# Altium PCB main_v2.PcbDoc
Units mm, origin at the board's own origin, x right, y up, seen from the top; angles counter-clockwise.
Board outline 126.75 x 53.1 mm, 2 copper layers (Top Layer, Bottom Layer); 68 components, 27 nets, 172 pads, 2 vias.
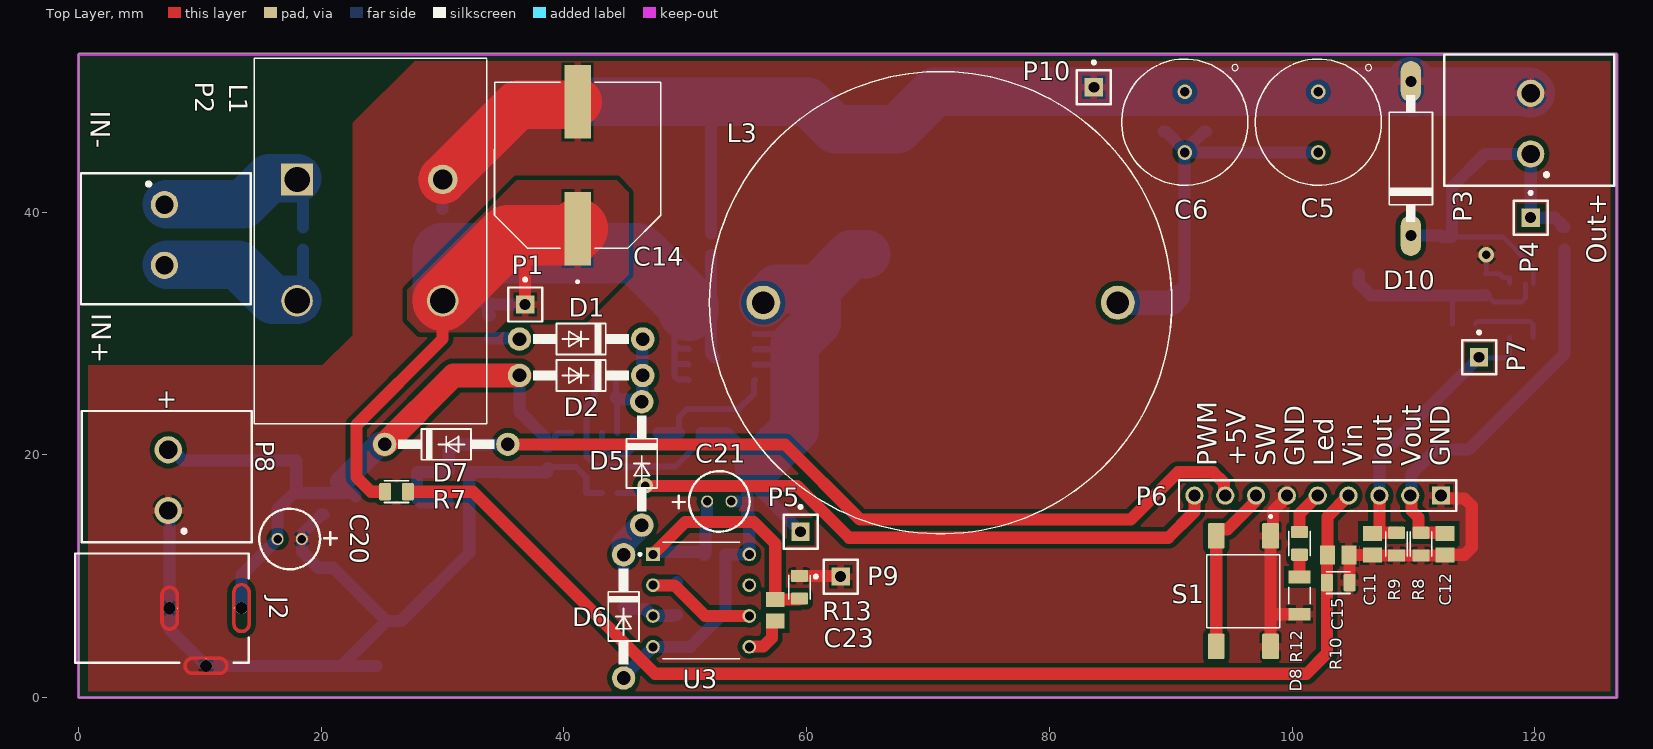
[diagram p0: Top Layer view]
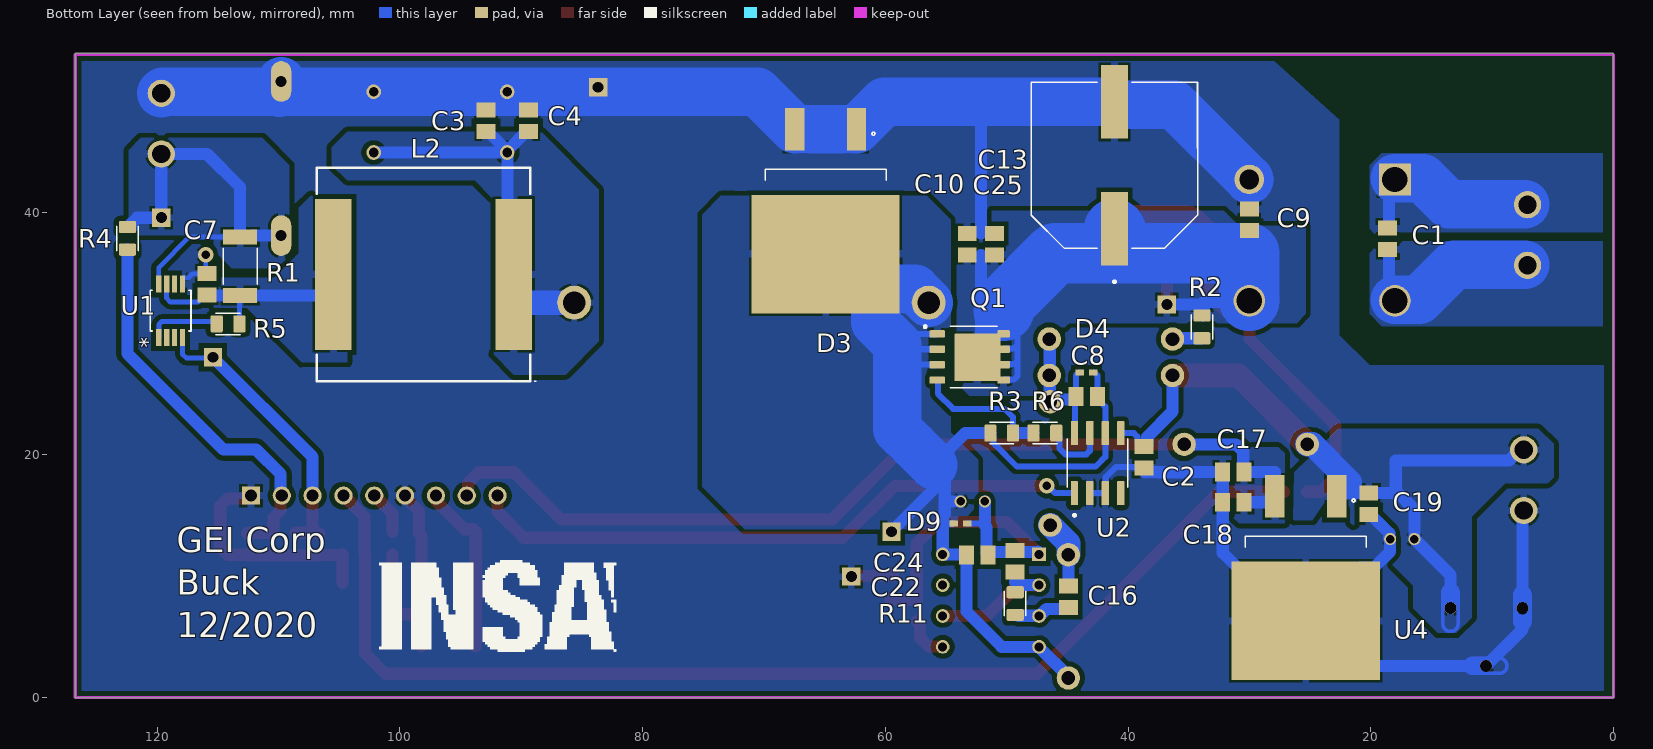
[diagram p1: Bottom Layer view, seen from below]
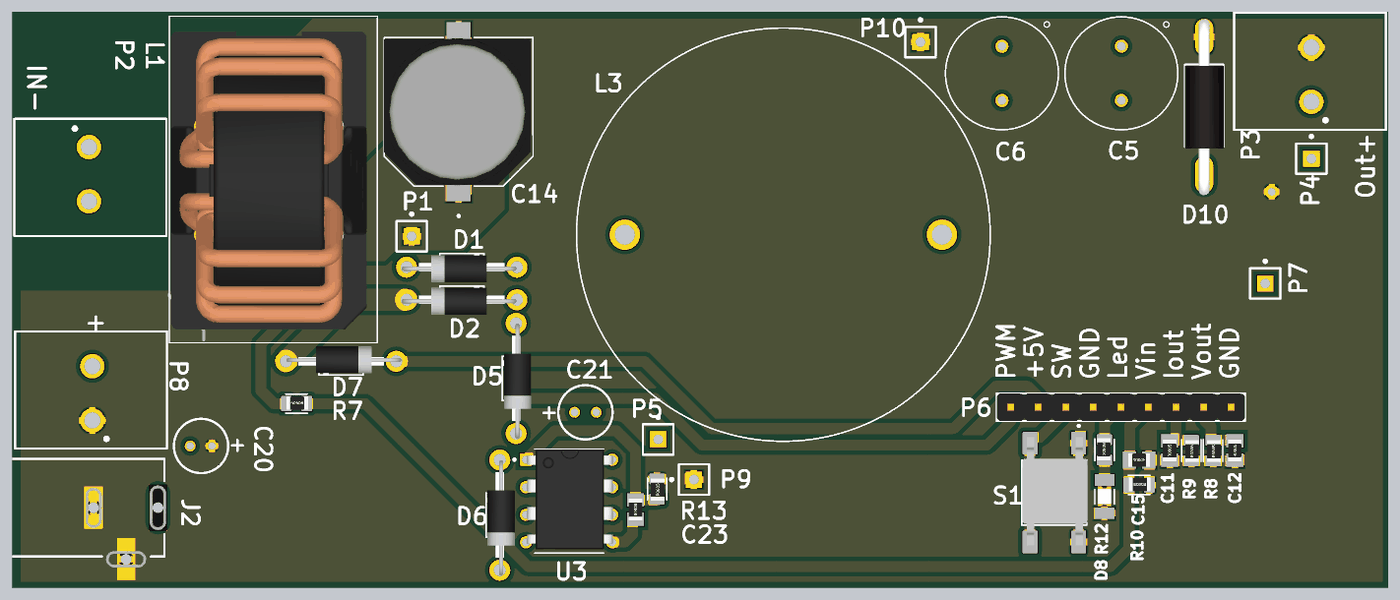
[diagram p2: 3D render of the assembled board from above, using the file's embedded part models]
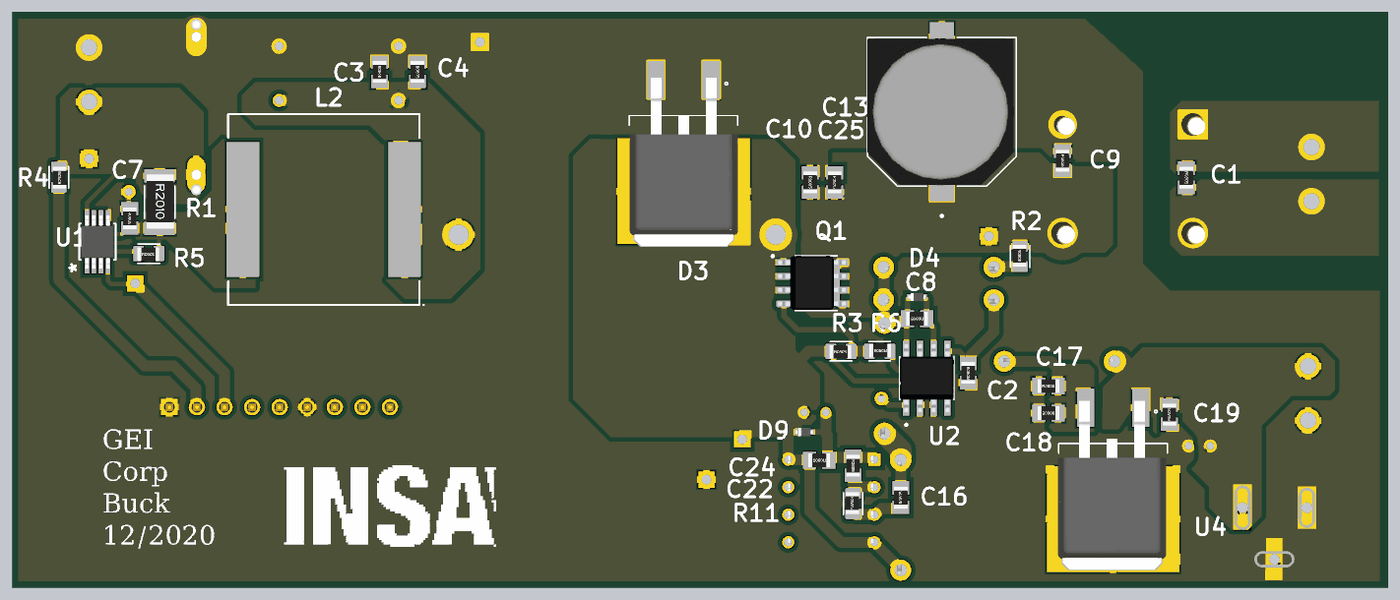
[diagram p3: 3D render of the assembled board from below, using the file's embedded part models]

## Layer stack, top to bottom
Top Solder: solder mask 0.0102, Solder Resist, Dk 3.5
Top Layer: signal copper 0.0356
Dielectric 1: dielectric 0.32, FR-4, Dk 4.8
Bottom Layer: signal copper 0.0356
Bottom Solder: solder mask 0.0102, Solder Resist, Dk 3.5

## Board outline
0,0 126.75,0 126.75,53.1 0,53.1

## Design rules (kind name [scope] priority, off if disabled: settings)
Clearance [All] p1: gap=0.4 ignorepadtopadclearanceinfootprint=FALSE except(0: Arc-Hole Track-Hole SMDPad-Hole THPad-Hole Via-Hole Fill-Hole Poly-Hole Region-Hole Text-Hole; 0.2: Arc-Arc Arc-Track Arc-SMDPad Arc-THPad Arc-Via Track-Track Track-SMDPad Track-THPad Track-Via SMDPad-SMDPad SMDPad-THPad SMDPad-Via THPad-THPad THPad-Via)
PolygonConnect [All] p1: connectstyle=Relief reliefconductorwidth=0.6 reliefentries=4 polygonreliefangle="90 Angle" airgapwidth=0.2
RoutingVias [All] p1: holewidth=0.711 width=1.27 viastyle="Through Hole" minholewidth=0.711 minwidth=1.27 maxholewidth=0.711 maxwidth=1.27
SolderMaskExpansion [All] p1: expansion=0.102 istentingtop=FALSE
Width [All] p1: maxlimit=10 minlimit=0.254 preferedwidth=1 minimp=50.000000 maximp=50.000000 favimp=50.000000
30 further rules are at their usual default settings.

## Components (designator, comment, footprint, x,y, rotation, side; value= is the part's Value field where it differs from the comment)
C1 "Cap" C0805 18.6,37.8 r270 bottom value=100n
C2 "Cap" C0805 38.7,19.8 r90 bottom value=100n
C3 "Cap" C0805 92.912,47.551 r270 bottom value=100n
C4 "Cap" C0805 89.412,47.551 r270 bottom value=100n
C5 "2 x UDB1H4RMPM1TD" C1-C2 102.162,47.551 r270 top value=4.7u
C6 "2 x UDB1H4RMPM1TD" C1-C2 91.162,47.551 r270 top value=4.7u
C7 "Cap" C0805 115.912,34.051 r270 bottom value=100n
C8 "Cap" C0805 43.412,24.801 r0 bottom value=330n
C9 "Cap" C0805 30,39.373 r270 bottom value=100n
C10 "Cap" C0805 53.25,37.373 r270 bottom value=100n
C11 "Cap" C0805 106.612,12.651 r90 top value=2n7
C12 "Cap" C0805 112.612,12.651 r90 top value=2n7
C13 "EEVFK1K101Q" C_Pol_EEV-FK1K101Q 41.25,43.873 r90 bottom value=100u
C14 "EEVFK1K101Q" C_Pol_EEV-FK1K101Q 41,43.873 r90 top value=100u
C15 "Cap" C0805 103.8,11.773 r180 top value=2n7
C16 "22n" C0805 44.912,8.316 r90 bottom
C17 "Cap" C0805 31.312,18.601 r180 bottom value=100n
C18 "1u" C0805 31.312,16.101 r0 bottom
C19 "Cap" C0805 20.162,15.966 r90 bottom value=100n
C20 "Cap Pol2" C_10u 16.4,13.073 r0 top value=10u
C21 "Cap Pol2" C_10u 53.8,16.173 r180 top value=10u
C22 "Cap" C0805 49.299,11.253 r270 bottom value=1n
C23 "Cap" C0805 57.412,7.201 r270 top value=100n
C24 "Cap" C0805 52.414,11.753 r0 bottom value=100n
C25 "Cap" C0805 51,37.373 r270 bottom value=100n
D1 "Diode 1N4004" diode_1N4004 41.412,29.551 r180 top
D2 "Diode 1N4004" diode_1N4004 41.412,26.551 r180 top
D3 "STPS30L60C" Diode_Scho 64.912,37.459 r270 bottom
D4 "BZX584C15G3-08" SOT-523 43.412,26.801 r180 bottom
D5 "Diode_1N4148" diode_1N4004 46.412,19.301 r270 top
D6 "Diode_1N4148" diode_1N4004 44.912,6.701 r270 top
D7 "Diode 1N4004" diode_1N4004 30.3,20.873 r0 top
D8 "KPTL-3216SURCK-01" LED 100.612,8.401 r270 top
D9 "BZX584C15G3-08" SOT-523 53.799,14.353 r180 bottom
D10 "Diode-DO15" DO15 109.912,44.301 r90 top
J2 "Prise d'alimentation4840.2201" "Prise d'alimentation4840.2201" 11.25,14.973 r270 top
L1 "EMI_Choke" EMI_Choke 24,37.7 r0 top
L2 "SRP1770TA-220M" SRP1770TA-220M 98.05,34.75 r0 bottom value=22uH
L3 "1140-121K-RC" L_120 71.412,32.551 r0 top value=120uH
P1 "Plug" PIN1 36.8,32.4 r0 top
P2 "Block_2Position" Block_2Position 7.2,38 r270 top
P3 "Block_2Position" Block_2Position 119.535,47.428 r90 top
P4 "Plug" PIN1 119.662,39.551 r0 top
P5 "Plug" PIN1 59.5,13.673 r0 top
P6 "Header 9" HDR1X9 112.272,16.651 r180 top
P7 "Plug" PIN1 115.412,28.051 r0 top
P8 "Block_2Position" Block_2Position 7.262,18.051 r90 top
P9 "Plug" PIN1 62.8,9.973 r90 top
P10 "Plug" PIN1 83.662,50.301 r0 top
Q1 "SIR120DP-T1-RE3" MOFET_SIR120DP-T1-RE3 52.962,28.201 r180 bottom
R1 "WSL20106L000FEA18" R0.006 113.162,35.551 r270 bottom value=0.006
R2 "Res1" R0805 33.912,30.551 r270 bottom value=1k
R3 "Res1" R0805 50.412,21.801 r180 bottom value=100k
R4 "Res1" R0805 122.45,37.85 r90 bottom value=100k
R5 "Res1" R0805 114.162,30.801 r180 bottom value=100
R6 "Res1" R0805 46.847,21.801 r0 bottom value=10
R7 "Res1" R0805 26.2,16.973 r180 top value=100k
R8 "Res1" R0805 110.612,12.651 r90 top value=6k2
R9 "Res1" R0805 108.612,12.651 r90 top value=5k1
R10 "Res1" R0805 103.8,9.473 r180 top value=6k2
R11 "Res1" R0805 49.299,7.753 r270 bottom value=100k
R12 "Res1" R0805 100.612,12.716 r270 top value=1k
R13 "Res1" R0805 59.4,9.1 r90 top value=1k
S1 "4-1437565-1" Switch 96.112,8.901 r270 top
U1 "LTC6101AIMS8PBF" LTC6101AIMS8#PBF 119.162,31.801 r90 bottom
U2 "IR7184STRPBF" IR7184STRPBF 42.507,19.199 r90 bottom
U3 "LM555CN/NOPB" LM555CN/NOPB 51.299,8.253 r0 top
U4 "L7805CD2T-TR" Volt_Reg 25.352,6.345 r270 bottom

## Footprints (in the part's own frame and the unit in brackets; to place one, negate y for a bottom-side part, rotate by r counter-clockwise, add the part's x,y. Pads: shape width x height; smd on the part's side, far side on the other; paste and mask are expansions set on the pad)
Block_2Position [mm]
  round 2.25 hole 1.5: 1(-2.627,-0.127) 2(2.373,-0.127)
  silkscreen extent -5.23,-7 5.57,7, body extent -5.23,-7 5.57,7, height 16
C1-C2 [mm]
  round 1.208 hole 0.8: NEG(-2.373,0) POS(2.627,0)
  silkscreen extent -5.07,-5.2 5.33,5.2, body extent -5.07,-5.2 5.33,5.2, height 15
C0805 [mm]
  rect 1.24x1.56 smd: 1(-0.885,0) 2(0.885,0)
  body extent -1,-0.62 1,0.63, height 0.6
C_10u [mm]
  round 1 hole 0.7: 1(0,0) 2(2,0)
  silkscreen extent -1.5,-2.5 4.86,2.5, body extent -1.5,-2.5 3.5,2.5, height 10
C_Pol_EEV-FK1K101Q [mm]
  rect 6.06x2.21 smd: 1(-5.225,-0.127) 2(5.225,-0.127)
  silkscreen extent -9.7,-6.98 6.85,6.73, body extent -6.8,-6.77 6.8,6.77, height 13.8
diode_1N4004 [mil]
  round 76 hole 44: A(200,0) C(-200,0)
  silkscreen extent -155,-50 155,50, body extent -198,-44 218,54, height 98
Diode_Scho [mm]
  rect 3.5x1.6 smd: 1(-9.367,2.54) 3(-9.367,-2.54)
  rect 9.75x12.2 smd paste-7: 4(0.908,0)
  silkscreen extent -9.14,-5 -5.18,5, body extent -9.57,-4.97 6.05,5.03, height 5.08
DO15 [mil]
  oval 132x66 hole 35.43: A(255,5) C(-245,5)
  silkscreen extent -201,-65 210,75, body extent -320,-66 320,76, height 161
EMI_Choke [mm]
  round 2.6 hole 2.1: 1(-6,-5) 4(6,-5)
  rect 2.6x2.6 hole 2.1: 2(-6,5)
  round 2.43 hole 1.62: 3(6,5)
  silkscreen extent -9.53,-15.11 9.65,14.99, body extent -9.34,-13.91 8.66,13.59, height 25.72
HDR1X9 [mm] "Connector; Header; 9 Position"
  rect 1.5x1.5 hole 1: 1(0,0)
  round 1.5 hole 1: 2(2.54,0) 3(5.08,0) 4(7.62,0) 5(10.16,0) 6(12.7,0) 7(15.24,0) 8(17.78,0) 9(20.32,0)
  silkscreen extent -1.27,-1.27 21.59,1.27, body extent -1.27,-1.27 21.59,1.27, height 8.89
IR7184STRPBF [mm]
  rrect15% 1.97x0.6 smd: 1(-2.348,1.905) 2(-2.348,0.635) 3(-2.348,-0.635) 4(-2.348,-1.905) 5(2.602,-1.905) 6(2.602,-0.635) 7(2.602,0.635) 8(2.602,1.905)
  silkscreen extent -4.27,-2.5 2.13,2.5, body extent -2.99,-2.5 3.24,2.5, height 2
L_120 [mm]
  round 2.8 hole 1.85: 1(-14.986,0) 2(14.224,0)
  silkscreen extent -19.43,-19.05 18.67,19.05, body extent -19.51,-18.84 18.49,19.15, height 26
LED [mm]
  rect 1.06x1.82 smd: 1(-1.528,0) 2(1.528,0)
  silkscreen extent -0.68,-0.9 0.68,0.9, body extent -0.93,-0.64 0.87,0.62, height 0.8
LM555CN/NOPB [mm]
  rect 1.13x1.13 hole 0.74: 1(-3.97,3.556)
  round 1.13 hole 0.74: 2(-3.97,1.016) 3(-3.97,-1.524) 4(-3.97,-4.064) 5(3.97,-4.064) 6(3.97,-1.524) 7(3.97,1.016) 8(3.97,3.556)
  silkscreen extent -5.13,-5.05 3.18,4.54, body extent -3.86,-4.73 4.01,4.47, height 3.85
LTC6101AIMS8#PBF [mil]
  rect 55x17 smd: 1(-83.25,27.88) 2(-83.25,2.29) 3(-83.25,-23.3) 4(-83.25,-48.89) 5(90.75,-48.89) 6(90.75,-23.3) 7(90.75,2.29) 8(90.75,27.88)
  silkscreen extent -62,-77 70,55, body extent -93,-70 100,49, height 41
MOFET_SIR120DP-T1-RE3 [mm]
  rrect25% 1.27x0.6 smd: 1(-2.756,1.778) 2(-2.756,0.508) 3(-2.756,-0.762) 4(-2.756,-2.032)
  rrect25% 1.02x0.6 smd: 5(2.709,-2.032) 6(2.709,-0.762) 7(2.709,0.508) 8(2.709,1.778)
  rrect5% 3.81x3.91 smd: 9(0.55,-0.15)
  silkscreen extent -3.85,-2.65 2.2,2.47, body extent -3.24,-2.6 3,2.4, height 2.05
PIN1 [mm] "Connector; Plug"
  rect 1.5x1.5 hole 0.9: 1(0,0)
  silkscreen extent -1.4,-1.4 1.4,2.17
"Prise d'alimentation4840.2201" [mm]
  rect 0.1x0.1 smd paste-1 mask+0: 1(7.594,1.579) 2(7.6,-3.1) 3(11.75,-0.75)
  round 1 hole 1 unplated: 1(7.594,2.179) 2(7.6,-3.75) 3(12.35,-0.75)
  Top Layer region: 7.6,-3.25 6.5,-3.25 6.474,-3.251 6.448,-3.253 6.422,-3.256 6.396,-3.261 6.371,-3.267 6.345,-3.274 6.321,-3.283 6.297,-3.293 6.273,-3.304 6.25,-3.317 6.228,-3.331 6.206,-3.345 6.185,-3.361 6.165,-3.378 6.146,-3.396 6.128,-3.415 6.111,-3.435 6.095,-3.456 6.081,-3.478 6.067,-3.5 6.054,-3.523 6.043,-3.547 6.033,-3.571 6.024,-3.595 6.017,-3.621 6.011,-3.646 6.006,-3.672 6.003,-3.698 6.001,-3.724 6,-3.75 6.001,-3.776 6.003,-3.802 6.006,-3.828 6.011,-3.854 6.017,-3.879 6.024,-3.905 6.033,-3.929 6.043,-3.953 6.054,-3.977 6.067,-4 6.081,-4.022 6.095,-4.044 6.111,-4.065 6.128,-4.085 6.146,-4.104 6.165,-4.122 6.185,-4.139 6.206,-4.155 6.228,-4.169 6.25,-4.183 6.273,-4.196 6.297,-4.207 6.321,-4.217 6.345,-4.226 6.371,-4.233 6.396,-4.239 6.422,-4.244 6.448,-4.247 6.474,-4.249 6.5,-4.25 7.6,-4.25 7.6,-4.5 6.5,-4.5 6.461,-4.499 6.422,-4.496 6.383,-4.491 6.344,-4.484 6.306,-4.474 6.268,-4.463 6.231,-4.45 6.195,-4.435 6.16,-4.418 6.125,-4.4 6.092,-4.379 6.059,-4.357 6.028,-4.333 5.998,-4.307 5.97,-4.28 5.943,-4.252 5.917,-4.222 5.893,-4.191 5.871,-4.158 5.85,-4.125 5.832,-4.09 5.815,-4.055 5.8,-4.019 5.787,-3.982 5.776,-3.944 5.766,-3.906 5.759,-3.867 5.754,-3.828 5.751,-3.789 5.75,-3.75 5.751,-3.711 5.754,-3.672 5.759,-3.633 5.766,-3.594 5.776,-3.556 5.787,-3.518 5.8,-3.481 5.815,-3.445 5.832,-3.41 5.85,-3.375 5.871,-3.342 5.893,-3.309 5.917,-3.278 5.943,-3.248 5.97,-3.22 5.998,-3.193 6.028,-3.167 6.059,-3.143 6.092,-3.121 6.125,-3.1 6.16,-3.082 6.195,-3.065 6.231,-3.05 6.268,-3.037 6.306,-3.026 6.344,-3.016 6.383,-3.009 6.422,-3.004 6.461,-3.001 6.5,-3 7.6,-3
  Top Layer region: 8.739,-3.001 8.778,-3.004 8.817,-3.009 8.856,-3.016 8.894,-3.026 8.932,-3.037 8.969,-3.05 9.005,-3.065 9.04,-3.082 9.075,-3.1 9.108,-3.121 9.141,-3.143 9.172,-3.167 9.202,-3.193 9.23,-3.22 9.257,-3.248 9.283,-3.278 9.307,-3.309 9.329,-3.342 9.35,-3.375 9.368,-3.41 9.385,-3.445 9.4,-3.481 9.413,-3.518 9.424,-3.556 9.434,-3.594 9.441,-3.633 9.446,-3.672 9.449,-3.711 9.45,-3.75 9.449,-3.789 9.446,-3.828 9.441,-3.867 9.434,-3.906 9.424,-3.944 9.413,-3.982 9.4,-4.019 9.385,-4.055 9.368,-4.09 9.35,-4.125 9.329,-4.158 9.307,-4.191 9.283,-4.222 9.257,-4.252 9.23,-4.28 9.202,-4.307 9.172,-4.333 9.141,-4.357 9.108,-4.379 9.075,-4.4 9.04,-4.418 9.005,-4.435 8.969,-4.45 8.932,-4.463 8.894,-4.474 8.856,-4.484 8.817,-4.491 8.778,-4.496 8.739,-4.499 8.7,-4.5 7.6,-4.5 7.6,-4.25 8.7,-4.25 8.726,-4.249 8.752,-4.247 8.778,-4.244 8.804,-4.239 8.829,-4.233 8.855,-4.226 8.879,-4.217 8.903,-4.207 8.927,-4.196 8.95,-4.183 8.972,-4.169 8.994,-4.155 9.015,-4.139 9.035,-4.122 9.054,-4.104 9.072,-4.085 9.089,-4.065 9.105,-4.044 9.119,-4.022 9.133,-4 9.146,-3.977 9.157,-3.953 9.167,-3.929 9.176,-3.905 9.183,-3.879 9.189,-3.854 9.194,-3.828 9.197,-3.802 9.199,-3.776 9.2,-3.75 9.199,-3.724 9.197,-3.698 9.194,-3.672 9.189,-3.646 9.183,-3.621 9.176,-3.595 9.167,-3.571 9.157,-3.547 9.146,-3.523 9.133,-3.5 9.119,-3.478 9.105,-3.456 9.089,-3.435 9.072,-3.415 9.054,-3.396 9.035,-3.378 9.015,-3.361 8.994,-3.345 8.972,-3.331 8.95,-3.317 8.927,-3.304 8.903,-3.293 8.879,-3.283 8.855,-3.274 8.829,-3.267 8.804,-3.261 8.778,-3.256 8.752,-3.253 8.726,-3.251 8.7,-3.25 7.6,-3.25 7.6,-3 8.7,-3
  Top Layer region: 12.389,1.099 12.428,1.096 12.467,1.091 12.506,1.084 12.544,1.074 12.582,1.063 12.619,1.05 12.655,1.035 12.69,1.018 12.725,1 12.758,0.979 12.791,0.957 12.822,0.933 12.852,0.907 12.88,0.88 12.907,0.852 12.933,0.822 12.957,0.791 12.979,0.758 13,0.725 13.018,0.69 13.035,0.655 13.05,0.619 13.063,0.582 13.074,0.544 13.084,0.506 13.091,0.467 13.096,0.428 13.099,0.389 13.1,0.35 13.1,-0.75 12.85,-0.75 12.85,0.35 12.849,0.376 12.847,0.402 12.844,0.428 12.839,0.454 12.833,0.479 12.826,0.505 12.817,0.529 12.807,0.553 12.796,0.577 12.783,0.6 12.769,0.622 12.755,0.644 12.739,0.665 12.722,0.685 12.704,0.704 12.685,0.722 12.665,0.739 12.644,0.755 12.622,0.769 12.6,0.783 12.577,0.796 12.553,0.807 12.529,0.817 12.505,0.826 12.479,0.833 12.454,0.839 12.428,0.844 12.402,0.847 12.376,0.849 12.35,0.85 12.324,0.849 12.298,0.847 12.272,0.844 12.246,0.839 12.221,0.833 12.195,0.826 12.171,0.817 12.147,0.807 12.123,0.796 12.1,0.783 12.078,0.769 12.056,0.755 12.035,0.739 12.015,0.722 11.996,0.704 11.978,0.685 11.961,0.665 11.945,0.644 11.931,0.622 11.917,0.6 11.904,0.577 11.893,0.553 11.883,0.529 11.874,0.505 11.867,0.479 11.861,0.454 11.856,0.428 11.853,0.402 11.851,0.376 11.85,0.35 11.85,-0.75 11.6,-0.75 11.6,0.35 11.601,0.389 11.604,0.428 11.609,0.467 11.616,0.506 11.626,0.544 11.637,0.582 11.65,0.619 11.665,0.655 11.682,0.69 11.7,0.725 11.721,0.758 11.743,0.791 11.767,0.822 11.793,0.852 11.82,0.88 11.848,0.907 11.878,0.933 11.909,0.957 11.942,0.979 11.975,1 12.01,1.018 12.045,1.035 12.081,1.05 12.118,1.063 12.156,1.074 12.194,1.084 12.233,1.091 12.272,1.096 12.311,1.099 12.35,1.1
  Top Layer region: 13.1,-1.75 13.099,-1.789 13.096,-1.928 13.091,-1.967 13.084,-2.006 13.074,-2.044 13.063,-2.082 13.05,-2.119 13.035,-2.155 13.018,-2.19 13,-2.225 12.979,-2.258 12.957,-2.291 12.933,-2.322 12.907,-2.352 12.88,-2.38 12.852,-2.407 12.822,-2.433 12.791,-2.457 12.758,-2.479 12.725,-2.5 12.69,-2.518 12.655,-2.535 12.619,-2.55 12.582,-2.563 12.544,-2.574 12.506,-2.584 12.467,-2.591 12.428,-2.596 12.389,-2.599 12.35,-2.6 12.311,-2.599 12.272,-2.596 12.233,-2.591 12.194,-2.584 12.156,-2.574 12.118,-2.563 12.081,-2.55 12.045,-2.535 12.01,-2.518 11.975,-2.5 11.942,-2.479 11.909,-2.457 11.878,-2.433 11.848,-2.407 11.82,-2.38 11.793,-2.352 11.767,-2.322 11.743,-2.291 11.721,-2.258 11.7,-2.225 11.682,-2.19 11.665,-2.155 11.65,-2.119 11.637,-2.082 11.626,-2.044 11.616,-2.006 11.609,-1.967 11.604,-1.928 11.601,-1.889 11.6,-1.85 11.6,-0.75 11.85,-0.75 11.85,-1.85 11.851,-1.876 11.853,-1.902 11.856,-1.928 11.861,-1.954 11.867,-1.979 11.874,-2.005 11.883,-2.029 11.893,-2.053 11.904,-2.077 11.917,-2.1 11.931,-2.122 11.945,-2.144 11.961,-2.165 11.978,-2.185 11.996,-2.204 12.015,-2.222 12.035,-2.239 12.056,-2.255 12.078,-2.269 12.1,-2.283 12.123,-2.296 12.147,-2.307 12.171,-2.317 12.195,-2.326 12.221,-2.333 12.246,-2.339 12.272,-2.344 12.298,-2.347 12.324,-2.349 12.35,-2.35 12.376,-2.349 12.402,-2.347 12.428,-2.344 12.454,-2.339 12.479,-2.333 12.505,-2.326 12.529,-2.317 12.553,-2.307 12.577,-2.296 12.6,-2.283 12.622,-2.269 12.644,-2.255 12.665,-2.239 12.685,-2.222 12.704,-2.204 12.722,-2.185 12.739,-2.165 12.755,-2.144 12.769,-2.122 12.783,-2.1 12.796,-2.077 12.807,-2.053 12.817,-2.029 12.826,-2.005 12.833,-1.979 12.839,-1.954 12.844,-1.928 12.847,-1.902 12.849,-1.876 12.85,-1.85 12.85,-0.75 13.1,-0.75
  Top Layer region: 7.594,2.679 6.294,2.679 6.268,2.678 6.242,2.676 6.216,2.673 6.19,2.668 6.165,2.662 6.139,2.655 6.115,2.646 6.091,2.636 6.067,2.625 6.044,2.612 6.022,2.598 6,2.584 5.979,2.568 5.959,2.551 5.94,2.533 5.922,2.514 5.905,2.494 5.889,2.473 5.875,2.451 5.861,2.429 5.848,2.406 5.837,2.382 5.827,2.358 5.818,2.334 5.811,2.308 5.805,2.283 5.8,2.257 5.797,2.231 5.795,2.205 5.794,2.179 5.795,2.153 5.797,2.127 5.8,2.101 5.805,2.075 5.811,2.05 5.818,2.024 5.827,2 5.837,1.976 5.848,1.952 5.861,1.929 5.875,1.907 5.889,1.885 5.905,1.864 5.922,1.844 5.94,1.825 5.959,1.807 5.979,1.79 6,1.774 6.022,1.76 6.044,1.746 6.067,1.733 6.091,1.722 6.115,1.712 6.139,1.703 6.165,1.696 6.19,1.69 6.216,1.685 6.242,1.682 6.268,1.68 6.294,1.679 7.594,1.679 7.594,1.429 6.294,1.429 6.255,1.43 6.216,1.433 6.177,1.438 6.138,1.445 6.1,1.455 6.062,1.466 6.025,1.479 5.989,1.494 5.954,1.511 5.919,1.529 5.886,1.55 5.853,1.572 5.822,1.596 5.792,1.622 5.764,1.649 5.737,1.677 5.711,1.707 5.687,1.738 5.665,1.771 5.644,1.804 5.626,1.839 5.609,1.874 5.594,1.91 5.581,1.947 5.57,1.985 5.56,2.023 5.553,2.062 5.548,2.101 5.545,2.14 5.544,2.179 5.545,2.218 5.548,2.257 5.553,2.296 5.56,2.335 5.57,2.373 5.581,2.411 5.594,2.448 5.609,2.484 5.626,2.519 5.644,2.554 5.665,2.587 5.687,2.62 5.711,2.651 5.737,2.681 5.764,2.709 5.792,2.736 5.822,2.762 5.853,2.786 5.886,2.808 5.919,2.829 5.954,2.847 5.989,2.864 6.025,2.879 6.062,2.892 6.1,2.903 6.138,2.913 6.177,2.92 6.216,2.925 6.255,2.928 6.294,2.929 7.594,2.929
  Top Layer region: 8.933,2.928 8.972,2.925 9.011,2.92 9.05,2.913 9.088,2.903 9.126,2.892 9.163,2.879 9.199,2.864 9.234,2.847 9.269,2.829 9.302,2.808 9.335,2.786 9.366,2.762 9.396,2.736 9.424,2.709 9.451,2.681 9.477,2.651 9.501,2.62 9.523,2.587 9.544,2.554 9.562,2.519 9.579,2.484 9.594,2.448 9.607,2.411 9.618,2.373 9.628,2.335 9.635,2.296 9.64,2.257 9.643,2.218 9.644,2.179 9.643,2.14 9.64,2.101 9.635,2.062 9.628,2.023 9.618,1.985 9.607,1.947 9.594,1.91 9.579,1.874 9.562,1.839 9.544,1.804 9.523,1.771 9.501,1.738 9.477,1.707 9.451,1.677 9.424,1.649 9.396,1.622 9.366,1.596 9.335,1.572 9.302,1.55 9.269,1.529 9.234,1.511 9.199,1.494 9.163,1.479 9.126,1.466 9.088,1.455 9.05,1.445 9.011,1.438 8.972,1.433 8.933,1.43 8.894,1.429 7.594,1.429 7.594,1.679 8.894,1.679 8.92,1.68 8.946,1.682 8.972,1.685 8.998,1.69 9.023,1.696 9.049,1.703 9.073,1.712 9.097,1.722 9.121,1.733 9.144,1.746 9.166,1.76 9.188,1.774 9.209,1.79 9.229,1.807 9.248,1.825 9.266,1.844 9.283,1.864 9.299,1.885 9.313,1.907 9.327,1.929 9.34,1.952 9.351,1.976 9.361,2 9.37,2.024 9.377,2.05 9.383,2.075 9.388,2.101 9.391,2.127 9.393,2.153 9.394,2.179 9.393,2.205 9.391,2.231 9.388,2.257 9.383,2.283 9.377,2.308 9.37,2.334 9.361,2.358 9.351,2.382 9.34,2.406 9.327,2.429 9.313,2.451 9.299,2.473 9.283,2.494 9.266,2.514 9.248,2.533 9.229,2.551 9.209,2.568 9.188,2.584 9.166,2.598 9.144,2.612 9.121,2.625 9.097,2.636 9.073,2.646 9.049,2.655 9.023,2.662 8.998,2.668 8.972,2.673 8.946,2.676 8.92,2.678 8.894,2.679 7.594,2.679 7.594,2.929 8.894,2.929
  Bottom Layer region: 7.6,-3.25 6.5,-3.25 6.474,-3.251 6.448,-3.253 6.422,-3.256 6.396,-3.261 6.371,-3.267 6.345,-3.274 6.321,-3.283 6.297,-3.293 6.273,-3.304 6.25,-3.317 6.228,-3.331 6.206,-3.345 6.185,-3.361 6.165,-3.378 6.146,-3.396 6.128,-3.415 6.111,-3.435 6.095,-3.456 6.081,-3.478 6.067,-3.5 6.054,-3.523 6.043,-3.547 6.033,-3.571 6.024,-3.595 6.017,-3.621 6.011,-3.646 6.006,-3.672 6.003,-3.698 6.001,-3.724 6,-3.75 6.001,-3.776 6.003,-3.802 6.006,-3.828 6.011,-3.854 6.017,-3.879 6.024,-3.905 6.033,-3.929 6.043,-3.953 6.054,-3.977 6.067,-4 6.081,-4.022 6.095,-4.044 6.111,-4.065 6.128,-4.085 6.146,-4.104 6.165,-4.122 6.185,-4.139 6.206,-4.155 6.228,-4.169 6.25,-4.183 6.273,-4.196 6.297,-4.207 6.321,-4.217 6.345,-4.226 6.371,-4.233 6.396,-4.239 6.422,-4.244 6.448,-4.247 6.474,-4.249 6.5,-4.25 7.6,-4.25 7.6,-4.5 6.5,-4.5 6.461,-4.499 6.422,-4.496 6.383,-4.491 6.344,-4.484 6.306,-4.474 6.268,-4.463 6.231,-4.45 6.195,-4.435 6.16,-4.418 6.125,-4.4 6.092,-4.379 6.059,-4.357 6.028,-4.333 5.998,-4.307 5.97,-4.28 5.943,-4.252 5.917,-4.222 5.893,-4.191 5.871,-4.158 5.85,-4.125 5.832,-4.09 5.815,-4.055 5.8,-4.019 5.787,-3.982 5.776,-3.944 5.766,-3.906 5.759,-3.867 5.754,-3.828 5.751,-3.789 5.75,-3.75 5.751,-3.711 5.754,-3.672 5.759,-3.633 5.766,-3.594 5.776,-3.556 5.787,-3.518 5.8,-3.481 5.815,-3.445 5.832,-3.41 5.85,-3.375 5.871,-3.342 5.893,-3.309 5.917,-3.278 5.943,-3.248 5.97,-3.22 5.998,-3.193 6.028,-3.167 6.059,-3.143 6.092,-3.121 6.125,-3.1 6.16,-3.082 6.195,-3.065 6.231,-3.05 6.268,-3.037 6.306,-3.026 6.344,-3.016 6.383,-3.009 6.422,-3.004 6.461,-3.001 6.5,-3 7.6,-3
  Bottom Layer region: 8.739,-3.001 8.778,-3.004 8.817,-3.009 8.856,-3.016 8.894,-3.026 8.932,-3.037 8.969,-3.05 9.005,-3.065 9.04,-3.082 9.075,-3.1 9.108,-3.121 9.141,-3.143 9.172,-3.167 9.202,-3.193 9.23,-3.22 9.257,-3.248 9.283,-3.278 9.307,-3.309 9.329,-3.342 9.35,-3.375 9.368,-3.41 9.385,-3.445 9.4,-3.481 9.413,-3.518 9.424,-3.556 9.434,-3.594 9.441,-3.633 9.446,-3.672 9.449,-3.711 9.45,-3.75 9.449,-3.789 9.446,-3.828 9.441,-3.867 9.434,-3.906 9.424,-3.944 9.413,-3.982 9.4,-4.019 9.385,-4.055 9.368,-4.09 9.35,-4.125 9.329,-4.158 9.307,-4.191 9.283,-4.222 9.257,-4.252 9.23,-4.28 9.202,-4.307 9.172,-4.333 9.141,-4.357 9.108,-4.379 9.075,-4.4 9.04,-4.418 9.005,-4.435 8.969,-4.45 8.932,-4.463 8.894,-4.474 8.856,-4.484 8.817,-4.491 8.778,-4.496 8.739,-4.499 8.7,-4.5 7.6,-4.5 7.6,-4.25 8.7,-4.25 8.726,-4.249 8.752,-4.247 8.778,-4.244 8.804,-4.239 8.829,-4.233 8.855,-4.226 8.879,-4.217 8.903,-4.207 8.927,-4.196 8.95,-4.183 8.972,-4.169 8.994,-4.155 9.015,-4.139 9.035,-4.122 9.054,-4.104 9.072,-4.085 9.089,-4.065 9.105,-4.044 9.119,-4.022 9.133,-4 9.146,-3.977 9.157,-3.953 9.167,-3.929 9.176,-3.905 9.183,-3.879 9.189,-3.854 9.194,-3.828 9.197,-3.802 9.199,-3.776 9.2,-3.75 9.199,-3.724 9.197,-3.698 9.194,-3.672 9.189,-3.646 9.183,-3.621 9.176,-3.595 9.167,-3.571 9.157,-3.547 9.146,-3.523 9.133,-3.5 9.119,-3.478 9.105,-3.456 9.089,-3.435 9.072,-3.415 9.054,-3.396 9.035,-3.378 9.015,-3.361 8.994,-3.345 8.972,-3.331 8.95,-3.317 8.927,-3.304 8.903,-3.293 8.879,-3.283 8.855,-3.274 8.829,-3.267 8.804,-3.261 8.778,-3.256 8.752,-3.253 8.726,-3.251 8.7,-3.25 7.6,-3.25 7.6,-3 8.7,-3
  Bottom Layer region: 12.389,1.099 12.428,1.096 12.467,1.091 12.506,1.084 12.544,1.074 12.582,1.063 12.619,1.05 12.655,1.035 12.69,1.018 12.725,1 12.758,0.979 12.791,0.957 12.822,0.933 12.852,0.907 12.88,0.88 12.907,0.852 12.933,0.822 12.957,0.791 12.979,0.758 13,0.725 13.018,0.69 13.035,0.655 13.05,0.619 13.063,0.582 13.074,0.544 13.084,0.506 13.091,0.467 13.096,0.428 13.099,0.389 13.1,0.35 13.1,-0.75 12.85,-0.75 12.85,0.35 12.849,0.376 12.847,0.402 12.844,0.428 12.839,0.454 12.833,0.479 12.826,0.505 12.817,0.529 12.807,0.553 12.796,0.577 12.783,0.6 12.769,0.622 12.755,0.644 12.739,0.665 12.722,0.685 12.704,0.704 12.685,0.722 12.665,0.739 12.644,0.755 12.622,0.769 12.6,0.783 12.577,0.796 12.553,0.807 12.529,0.817 12.505,0.826 12.479,0.833 12.454,0.839 12.428,0.844 12.402,0.847 12.376,0.849 12.35,0.85 12.324,0.849 12.298,0.847 12.272,0.844 12.246,0.839 12.221,0.833 12.195,0.826 12.171,0.817 12.147,0.807 12.123,0.796 12.1,0.783 12.078,0.769 12.056,0.755 12.035,0.739 12.015,0.722 11.996,0.704 11.978,0.685 11.961,0.665 11.945,0.644 11.931,0.622 11.917,0.6 11.904,0.577 11.893,0.553 11.883,0.529 11.874,0.505 11.867,0.479 11.861,0.454 11.856,0.428 11.853,0.402 11.851,0.376 11.85,0.35 11.85,-0.75 11.6,-0.75 11.6,0.35 11.601,0.389 11.604,0.428 11.609,0.467 11.616,0.506 11.626,0.544 11.637,0.582 11.65,0.619 11.665,0.655 11.682,0.69 11.7,0.725 11.721,0.758 11.743,0.791 11.767,0.822 11.793,0.852 11.82,0.88 11.848,0.907 11.878,0.933 11.909,0.957 11.942,0.979 11.975,1 12.01,1.018 12.045,1.035 12.081,1.05 12.118,1.063 12.156,1.074 12.194,1.084 12.233,1.091 12.272,1.096 12.311,1.099 12.35,1.1
  Bottom Layer region: 13.1,-1.85 13.099,-1.889 13.096,-1.928 13.091,-1.967 13.084,-2.006 13.074,-2.044 13.063,-2.082 13.05,-2.119 13.035,-2.155 13.018,-2.19 13,-2.225 12.979,-2.258 12.957,-2.291 12.933,-2.322 12.907,-2.352 12.88,-2.38 12.852,-2.407 12.822,-2.433 12.791,-2.457 12.758,-2.479 12.725,-2.5 12.69,-2.518 12.655,-2.535 12.619,-2.55 12.582,-2.563 12.544,-2.574 12.506,-2.584 12.467,-2.591 12.428,-2.596 12.389,-2.599 12.35,-2.6 12.311,-2.599 12.272,-2.596 12.233,-2.591 12.194,-2.584 12.156,-2.574 12.118,-2.563 12.081,-2.55 12.045,-2.535 12.01,-2.518 11.975,-2.5 11.942,-2.479 11.909,-2.457 11.878,-2.433 11.848,-2.407 11.82,-2.38 11.793,-2.352 11.767,-2.322 11.743,-2.291 11.721,-2.258 11.7,-2.225 11.682,-2.19 11.665,-2.155 11.65,-2.119 11.637,-2.082 11.626,-2.044 11.616,-2.006 11.609,-1.967 11.604,-1.928 11.601,-1.889 11.6,-1.85 11.6,-0.75 11.85,-0.75 11.85,-1.85 11.851,-1.876 11.853,-1.902 11.856,-1.928 11.861,-1.954 11.867,-1.979 11.874,-2.005 11.883,-2.029 11.893,-2.053 11.904,-2.077 11.917,-2.1 11.931,-2.122 11.945,-2.144 11.961,-2.165 11.978,-2.185 11.996,-2.204 12.015,-2.222 12.035,-2.239 12.056,-2.255 12.078,-2.269 12.1,-2.283 12.123,-2.296 12.147,-2.307 12.171,-2.317 12.195,-2.326 12.221,-2.333 12.246,-2.339 12.272,-2.344 12.298,-2.347 12.324,-2.349 12.35,-2.35 12.376,-2.349 12.402,-2.347 12.428,-2.344 12.454,-2.339 12.479,-2.333 12.505,-2.326 12.529,-2.317 12.553,-2.307 12.577,-2.296 12.6,-2.283 12.622,-2.269 12.644,-2.255 12.665,-2.239 12.685,-2.222 12.704,-2.204 12.722,-2.185 12.739,-2.165 12.755,-2.144 12.769,-2.122 12.783,-2.1 12.796,-2.077 12.807,-2.053 12.817,-2.029 12.826,-2.005 12.833,-1.979 12.839,-1.954 12.844,-1.928 12.847,-1.902 12.849,-1.876 12.85,-1.85 12.85,-0.75 13.1,-0.75
  Bottom Layer region: 7.594,2.679 6.294,2.679 6.268,2.678 6.242,2.676 6.216,2.673 6.19,2.668 6.165,2.662 6.139,2.655 6.115,2.646 6.091,2.636 6.067,2.625 6.044,2.612 6.022,2.598 6,2.584 5.979,2.568 5.959,2.551 5.94,2.533 5.922,2.514 5.905,2.494 5.889,2.473 5.875,2.451 5.861,2.429 5.848,2.406 5.837,2.382 5.827,2.358 5.818,2.334 5.811,2.308 5.805,2.283 5.8,2.257 5.797,2.231 5.795,2.205 5.794,2.179 5.795,2.153 5.797,2.127 5.8,2.101 5.805,2.075 5.811,2.05 5.818,2.024 5.827,2 5.837,1.976 5.848,1.952 5.861,1.929 5.875,1.907 5.889,1.885 5.905,1.864 5.922,1.844 5.94,1.825 5.959,1.807 5.979,1.79 6,1.774 6.022,1.76 6.044,1.746 6.067,1.733 6.091,1.722 6.115,1.712 6.139,1.703 6.165,1.696 6.19,1.69 6.216,1.685 6.242,1.682 6.268,1.68 6.294,1.679 7.594,1.679 7.594,1.429 6.294,1.429 6.255,1.43 6.216,1.433 6.177,1.438 6.138,1.445 6.1,1.455 6.062,1.466 6.025,1.479 5.989,1.494 5.954,1.511 5.919,1.529 5.886,1.55 5.853,1.572 5.822,1.596 5.792,1.622 5.764,1.649 5.737,1.677 5.711,1.707 5.687,1.738 5.665,1.771 5.644,1.804 5.626,1.839 5.609,1.874 5.594,1.91 5.581,1.947 5.57,1.985 5.56,2.023 5.553,2.062 5.548,2.101 5.545,2.14 5.544,2.179 5.545,2.218 5.548,2.257 5.553,2.296 5.56,2.335 5.57,2.373 5.581,2.411 5.594,2.448 5.609,2.484 5.626,2.519 5.644,2.554 5.665,2.587 5.687,2.62 5.711,2.651 5.737,2.681 5.764,2.709 5.792,2.736 5.822,2.762 5.853,2.786 5.886,2.808 5.919,2.829 5.954,2.847 5.989,2.864 6.025,2.879 6.062,2.892 6.1,2.903 6.138,2.913 6.177,2.92 6.216,2.925 6.255,2.928 6.294,2.929 7.594,2.929
  Bottom Layer region: 8.933,2.928 8.972,2.925 9.011,2.92 9.05,2.913 9.088,2.903 9.126,2.892 9.163,2.879 9.199,2.864 9.234,2.847 9.269,2.829 9.302,2.808 9.335,2.786 9.366,2.762 9.396,2.736 9.424,2.709 9.451,2.681 9.477,2.651 9.501,2.62 9.523,2.587 9.544,2.554 9.562,2.519 9.579,2.484 9.594,2.448 9.607,2.411 9.618,2.373 9.628,2.335 9.635,2.296 9.64,2.257 9.643,2.218 9.644,2.179 9.643,2.14 9.64,2.101 9.635,2.062 9.628,2.023 9.618,1.985 9.607,1.947 9.594,1.91 9.579,1.874 9.562,1.839 9.544,1.804 9.523,1.771 9.501,1.738 9.477,1.707 9.451,1.677 9.424,1.649 9.396,1.622 9.366,1.596 9.335,1.572 9.302,1.55 9.269,1.529 9.234,1.511 9.199,1.494 9.163,1.479 9.126,1.466 9.088,1.455 9.05,1.445 9.011,1.438 8.972,1.433 8.933,1.43 8.894,1.429 7.594,1.429 7.594,1.679 8.894,1.679 8.92,1.68 8.946,1.682 8.972,1.685 8.998,1.69 9.023,1.696 9.049,1.703 9.073,1.712 9.097,1.722 9.121,1.733 9.144,1.746 9.166,1.76 9.188,1.774 9.209,1.79 9.229,1.807 9.248,1.825 9.266,1.844 9.283,1.864 9.299,1.885 9.313,1.907 9.327,1.929 9.34,1.952 9.351,1.976 9.361,2 9.37,2.024 9.377,2.05 9.383,2.075 9.388,2.101 9.391,2.127 9.393,2.153 9.394,2.179 9.393,2.205 9.391,2.231 9.388,2.257 9.383,2.283 9.377,2.308 9.37,2.334 9.361,2.358 9.351,2.382 9.34,2.406 9.327,2.429 9.313,2.451 9.299,2.473 9.283,2.494 9.266,2.514 9.248,2.533 9.229,2.551 9.209,2.568 9.188,2.584 9.166,2.598 9.144,2.612 9.121,2.625 9.097,2.636 9.073,2.646 9.049,2.655 9.023,2.662 8.998,2.668 8.972,2.673 8.946,2.676 8.92,2.678 8.894,2.679 7.594,2.679 7.594,2.929 8.894,2.929
  silkscreen extent 3.09,-11.52 12.09,2.78
R0.006 [mm]
  rect 1.21x2.81 smd: 1(-2.416,0) 2(2.416,0)
  silkscreen extent -1.49,-1.4 1.49,1.4, body extent -2.55,-1.2 2.45,1.3, height 0.55
R0805 [mm]
  rrect25% 1x1.42 smd: 1(-0.935,0) 2(0.935,0)
  silkscreen extent -1,-0.89 1,0.89, body extent -1.05,-0.69 0.95,0.56, height 0.6
SOT-523 [mm]
  rect 0.7x0.5 smd: 1(0.55,0) 2(-0.55,0)
  body extent -0.8,-0.4 0.8,0.4, height 0.65
SRP1770TA-220M [mm]
  rect 3x12.45 smd: 1(-7.445,-0.127) 2(7.445,-0.127)
  silkscreen extent -9.25,-8.93 8.8,8.72, body extent -8.89,-8.93 8.8,8.67, height 5
Switch [mm]
  rrect15% 2.1x1.38 smd: 1(-4.423,2.113) 2(4.677,2.113) 3(-4.423,-2.367) 4(4.677,-2.367)
  silkscreen extent -6.12,-3.13 3.13,2.87, body extent -5,-3.08 5,2.92, height 4.9
Volt_Reg [mm]
  rect 3.5x1.6 smd: 1(-10.256,2.54) 3(-10.256,-2.54)
  rect 9.75x12.2 smd paste-7: 4(0.019,0)
  silkscreen extent -10.03,-5 -6.07,5, body extent -10.87,-5.1 4.75,4.9, height 5.08

## Part data
C1 C2 C3 C4 C7 C9 C10 C17 C19 C23 C24 C25: "Capacitor", LatestRevisionDate=17-Jul-2002, LatestRevisionNote="Re-released for DXP Platform.", PackageDescription="Radial Cap, Thru-Hole; 2 Leads; 0.3 in Pin Spacing", PackageReference=RAD-0.3, Published=8-Jun-2000, Publisher="Altium Limited", Supplier 1=Mouser
C5 C6: library part "Cap Pol2", LatestRevisionDate=17-Jul-2002, LatestRevisionNote="Re-released for DXP Platform.", PackageDescription="Polarized Capacitor; 2 Leads", PackageReference=POLAR0.8, Published=8-Jun-2000, Publisher="Altium Limited", Supplier 1=Digi-Key
C8: library part Cap_2, "Capacitor", LatestRevisionDate=17-Jul-2002, LatestRevisionNote="Re-released for DXP Platform.", PackageDescription="Radial Cap, Thru-Hole; 2 Leads; 0.3 in Pin Spacing", PackageReference=RAD-0.3, Published=8-Jun-2000, Publisher="Altium Limited", Supplier 1=Mouser
C11 C12 C15: library part Cap_1, "Capacitor", LatestRevisionDate=17-Jul-2002, LatestRevisionNote="Re-released for DXP Platform.", PackageDescription="Radial Cap, Thru-Hole; 2 Leads; 0.3 in Pin Spacing", PackageReference=RAD-0.3, Published=8-Jun-2000, Publisher="Altium Limited", Supplier 1=Mouser
C13 C14: library part "Cap Pol2_1", "Polarized Capacitor (Axial)", LatestRevisionDate=17-Jul-2002, LatestRevisionNote="Re-released for DXP Platform.", PackageDescription="Polarized Capacitor; 2 Leads", PackageReference=POLAR0.8, Published=8-Jun-2000, Publisher="Altium Limited", Supplier 1=Mouser
C16: library part Cap_22n
C18: library part C_4, Valeur=1u
C20 C21: library part "Cap Pol2_2", "Polarized Capacitor (Axial)", LatestRevisionDate=17-Jul-2002, LatestRevisionNote="Re-released for DXP Platform.", PackageDescription="Polarized Capacitor; 2 Leads", PackageReference=POLAR0.8, Published=8-Jun-2000, Publisher="Altium Limited", Supplier 1=Mouser
C22: library part Cap_3, "Capacitor", LatestRevisionDate=17-Jul-2002, LatestRevisionNote="Re-released for DXP Platform.", PackageDescription="Radial Cap, Thru-Hole; 2 Leads; 0.3 in Pin Spacing", PackageReference=RAD-0.3, Published=8-Jun-2000, Publisher="Altium Limited", Supplier 1=Mouser
D1 D2 D7: "1 Amp General Purpose Rectifier", Code_JEDEC=DO-204-AL, ComponentLink1Description="Manufacturer Link", ComponentLink1URL=http://www.fairchildsemi.com/, ComponentLink2Description=Datasheet, ComponentLink2URL=http://www.fairchildsemi.com/ds/1N%2F1N4001.pdf, DatasheetVersion=1998, LatestRevisionDate=17-Jul-2002, LatestRevisionNote="Re-released for DXP Platform.", PackageDescription="Diode, Axial; Body 5.2 x 2.7 mm (LxDia. max), Lead Dia. 0.86 mm (max)", PackageReference=DO-41, PackageVersion=Aug-1999, Published=8-Jun-2000, Publisher="Altium Limited", Supplier 1=Digi-Key
D3: library part "D Schottky", "Schottky Diode", Code_JEDEC=DO-214-AA, LatestRevisionDate=17-Jul-2002, LatestRevisionNote="Re-released for DXP Platform.", PackageDescription="DO-214-AA/SMB; 2 C-Bend Leads; Body 5.3 x 3.6 mm, inc. leads (LxW)", PackageReference=SMB, Published=8-Jun-2000, Publisher="Altium Limited"
D4 D9: library part "D Zener", "Zener Diode 15V", LatestRevisionDate=17-Jul-2002, LatestRevisionNote="Re-released for DXP Platform.", PackageDescription="Diode, Thru-Hole; 2 Leads; 0.7 in Pin Spacing", PackageReference=DIODE-0.7, Published=8-Jun-2000, Publisher="Altium Limited", Supplier 1=Mouser
D8: library part LED2, "Typical RED, GREEN, YELLOW, AMBER GaAs LED", LatestRevisionDate=17-Jul-2002, LatestRevisionNote="Re-released for DXP Platform.", PackageDescription="SM LED; 2 Flat Leads", PackageReference=3.2X1.6X1.1, PackageVersion=Feb-2002, Published=8-Jun-2000, Publisher="Altium Limited", Supplier 1=Farnell
D10: "P6KE43CA", Ref=P6KE43CA, Tension=43V
L1: "1mH 20A"
L3: library part Inductor, Code_IEC=1005, Code_JEITA=0402, LatestRevisionDate=29-May-2009, LatestRevisionNote="IPC-7351 Footprint Added.", PackageDescription="Chip Inductor", PackageReference=0402-A, Published=8-Jun-2000, Publisher="Altium Limited", Supplier 1=Mouser
P6: "Header, 9-Pin", LatestRevisionDate=17-Jul-2002, LatestRevisionNote="Re-released for DXP Platform.", Publisher="Altium Limited"
R1: library part Res1_2, "Resistor", LatestRevisionDate=17-Jul-2002, LatestRevisionNote="Re-released for DXP Platform.", PackageDescription="Axial Device, Thru-Hole; 2 Leads; 0.3 in Pin Spacing", PackageReference=AXIAL-0.3, Published=8-Jun-2000, Publisher="Altium Limited", Supplier 1=Mouser
R2 R12 R13: library part Res1_6, "Resistor", LatestRevisionDate=17-Jul-2002, LatestRevisionNote="Re-released for DXP Platform.", PackageDescription="Axial Device, Thru-Hole; 2 Leads; 0.3 in Pin Spacing", PackageReference=AXIAL-0.3, Published=8-Jun-2000, Publisher="Altium Limited", Supplier 1=Mouser
R3 R4 R7 R11: "Resistor", LatestRevisionDate=17-Jul-2002, LatestRevisionNote="Re-released for DXP Platform.", PackageDescription="Axial Device, Thru-Hole; 2 Leads; 0.3 in Pin Spacing", PackageReference=AXIAL-0.3, Published=8-Jun-2000, Publisher="Altium Limited", Supplier 1=Digi-Key, Supplier 2=Mouser
R5: library part Res1_3, "Resistor", LatestRevisionDate=17-Jul-2002, LatestRevisionNote="Re-released for DXP Platform.", PackageDescription="Axial Device, Thru-Hole; 2 Leads; 0.3 in Pin Spacing", PackageReference=AXIAL-0.3, Published=8-Jun-2000, Publisher="Altium Limited", Supplier 1=Mouser
R6: library part Res1_5, "Resistor", LatestRevisionDate=17-Jul-2002, LatestRevisionNote="Re-released for DXP Platform.", PackageDescription="Axial Device, Thru-Hole; 2 Leads; 0.3 in Pin Spacing", PackageReference=AXIAL-0.3, Published=8-Jun-2000, Publisher="Altium Limited", Supplier 1=Mouser
R8 R10: library part Res1_1, "Resistor", LatestRevisionDate=17-Jul-2002, LatestRevisionNote="Re-released for DXP Platform.", PackageDescription="Axial Device, Thru-Hole; 2 Leads; 0.3 in Pin Spacing", PackageReference=AXIAL-0.3, Published=8-Jun-2000, Publisher="Altium Limited", Supplier 1=Mouser
R9: library part Res1_4, "Resistor", LatestRevisionDate=17-Jul-2002, LatestRevisionNote="Re-released for DXP Platform.", PackageDescription="Axial Device, Thru-Hole; 2 Leads; 0.3 in Pin Spacing", PackageReference=AXIAL-0.3, Published=8-Jun-2000, Publisher="Altium Limited", Supplier 1=Mouser
S1: library part SW-PB, "Switch", LatestRevisionDate=17-Jul-2002, LatestRevisionNote="Re-released for DXP Platform.", PackageDescription="Switch; 2 Leads", PackageReference=SPST-2, Published=24-Mar-1999, Publisher="Altium Limited", Supplier 1=Mouser
U1: "SP Amp Current Sense Amp Single 60V Automotive 8-Pin MSOP Tube", Package="MSOP-8 Analog Devices", Availability=Warning, Check_prices=https://www.snapeda.com/parts/LTC6101AIMS8%23PBF/Analog%20Devices/view-part/4331140/?ref=eda, MF="Analog Devices", MP=LTC6101AIMS8#PBF, Price=None, Purchase-URL=https://pricing.snapeda.com/search/part/LTC6101AIMS8#PBF/?ref=eda, SnapEDA_Link=https://www.snapeda.com/parts/LTC6101AIMS8%23PBF/Analog%20Devices/view-part/4331140/?ref=snap, Supplier 1=Mouser
U2: "Drives IGBT/MOSFET power devices", Package="SOIC-8 Infineon", Supplier Part Number 1=942-IR7184STRPBF, Availability=Unavailable, MF="Infineon Technologies", MP=IR7184STRPBF, Price=None, SnapEDA_Link=https://www.snapeda.com/parts/IR7184STRPBF/Infineon%20Technologies/view-part/1224754/?ref=snap, Supplier 1=Mouser
U3: Package=None, Availability=Unavailable, MP=LM555CN/NOPB, Price=None, Supplier 1=Mouser
U4: library part "Volt Reg", "Voltage Regulator", LatestRevisionDate=29-May-2009, LatestRevisionNote="IPC-7351 Footprint Added.", PackageDescription="3-Pin Transistor Outline Package 2.54 mm Pitch, 15.1 mm Lead Span", PackageReference=D2PAK, Published=24-Mar-1999, Publisher="Altium Limited", Supplier 1=Mouser
P1 P4 P5 P7 P9 P10: LatestRevisionDate=17-Jul-2002, LatestRevisionNote="Re-released for DXP Platform.", Publisher="Altium Limited"

## Via types
v1: diameter 1.27, hole 0.711, Top Layer to Bottom Layer, 2 vias

## Nets (pads, with @x,y where several pads share a name; then routed paths per layer and width w, separated by ;. In a path a pad name is that pad's centre, name@x,y a point inside that pad or via, vN(x,y) a via of type N, cw(c..) or ccw(c..) an arc to the next point about the centre after c; other vN are vias at no path point)
+5V: C17.2 C18.1 D7.A P6.8 U4.3 | length 78.9
  Top Layer w1: D7.A 58.2,20.873 64.4,14.673 86.7,14.673 90.6,18.573 93.5,18.573 94.3,17.773 94.396,17.677 94.396,16.746 P6.8 P6.8@94.512,16.671
  Bottom Layer w1: U4.3 27.892,16.401 28.192,16.101 C18.1 ; U4.3 27.892,18.601 C17.2 30.5,18.674 30.5,20.273 31.1,20.873 D7.A
+12V: C2.2 C19.2 C20.1 D2.A D7.C J2.1 P8.2 U2.5 U4.1 | length 57.5
  Top Layer w2: D7.C 30.898,26.551 D2.A
  Bottom Layer w0.5: C2.2@38.86,20.985 39.16,20.985 39.23,21.055 39.23,21.508 39.523,21.801 U2.5
  Bottom Layer w1: P8.2 7.727,20.424 8.6,19.551 17.732,19.551 ; J2.1@13.429,7.379 13.429,10.102 C20.1 16.4,15.512 17.939,17.051 ; 17.939,19.551 17.939,17.051 ; U4.1 22.562,16.851 21.7,16.851 C19.2 18.139,16.851 17.939,17.051 ; D2.A@36.412,26.471 D2.A 36.332,23.573 38.42,21.485 38.42,20.805 38.54,20.685 C2.2
  Bottom Layer w2: 21.7,17.773 24.8,20.873 D7.C
BUCK_OUT: D10.C P3.1 P4.1 R1.1 R4.2 U1.8 | length 32.7
  Bottom Layer w0.4: R1.1 117.346,37.967 119.87,35.443 U1.8
  Bottom Layer w1: D10.C 112.251,38.078 112.362,37.967 R1.1 113.162,42.062 115.901,44.801 P3.1 P4.1 121.654,39.551 122.24,38.965 122.24,38.785 R4.2
GND: C2.1 C3.1 C4.1 C7.1 C9.1 C10.1 C11.1 C12.1 C13.2 C14.2 C15.1 C17.1 C18.2 C19.1 C20.2 C25.1 D3.1 D3.3 D8.2 D10.A J2.2 J2.3 L1.3 P3.2 P6.1 P6.6 P8.1 P9.1 P10.1 R8.1 R9.1 R10.1 R13.2 S1.1 S1.2 U1.5 U2.2 U2.3 U4.4 | length 240
  Top Layer w1: R13.2@59.35,10.035 R13.2 62.738,10.035 P9.1 ; S1.2 98.225,7.151 ; P6.6 99.572,16.516 98.415,15.359 98.415,13.514 S1.1 98.225,7.151 ; D8.2@100.642,6.903 D8.2 98.503,6.873 98.225,7.151 ; R10.1 104.735,11.723 C15.1@104.689,11.769 ; C15.1@104.735,11.823 C15.1 C15.1@104.689,11.769 ; P6.1 112.522,16.401 114.214,16.401 114.8,15.815 114.8,12.373 114.2,11.773 112.619,11.773 C12.1 112.562,11.716 R8.1 R9.1 106.662,11.716 C11.1 106.608,11.769 C15.1@104.689,11.769
  Top Layer w4: L1.3 36.173,48.873 40.902,48.873 C14.2
  Bottom Layer w0.4: v1(116,36.5) 116,35.024 C7.1 117.09,34.936 117.422,34.604 117.904,34.604 117.92,34.588 U1.5
  Bottom Layer w0.5: C2.1 38.785,19 41,19 41.832,18.168 41.832,16.89 U2.3 U2.2
  Bottom Layer w1: P8.1 7.5,15.313 7.5,7.373 7.5,5.623 10.5,2.623 21.949,2.623 U4.4@24.549,2.623 ; C19.1 20.002,15.081 18.468,13.547 18.468,13.141 C20.2 18.4,12.053 19.752,10.701 20.977,10.701 U4.4 ; U4.4@21.949,2.923 U4.4 ; C9.1 L1.3 ; C2.1 38.58,18.795 38.58,18.581 34.917,18.581 34.897,18.601 C17.1 C18.2 32.197,11.946 26.577,6.326 U4.4 ; 51.75,49.098 52.125,48.723 52.125,38.258
  Bottom Layer w4: L1.3 36.173,48.873 40.898,48.873 C13.2 51.75,49.098 60.1,49.098 D3.1 D3.3 70.55,49.924 91.162,49.924 102.162,49.924 D10.A@109.876,49.924 ; D10.A 109.785,50.015 D10.A@109.876,49.924 ; D10.A@109.95,49.85 D10.A@109.876,49.924 ; P3.2 119.539,49.924 D10.A@109.876,49.924
INPUT: C9.2 C10.2 C13.1 C14.1 C25.2 L1.4 P1.1 Q1.5 Q1.6 Q1.7 Q1.8 Q1.9 R2.1 R7.2 | length 93.5
  Top Layer w1: R7.2 24.1,16.973 22.9,18.173 22.9,22.473 30,29.573 L1.4 ; 35.418,38.118 36.8,36.736 P1.1 P1.1@36.827,32.373
  Top Layer w5: L1.4 35.418,38.118 40.597,38.118 C14.1
  Bottom Layer w0.5: 49.1,30.272 49.1,29.1 ; Q1.5 50.203,26.219 49.393,26.219 49.1,26.512 49.1,27.782 ; Q1.6 50.203,27.489 49.393,27.489 49.1,27.782 ; Q1.7 50.203,28.759 49.441,28.759 49.1,29.1 ; 49.1,27.782 49.1,29.1
  Bottom Layer w1: L1.4 30.1,32.6 33.731,32.6 ; R2.1 33.731,31.486 33.731,32.6 ; P1.1@36.6,32.6 P1.1 33.931,32.4 33.731,32.6 ; 52.125,36.488 52.125,28.338 Q1.9
  Bottom Layer w5: L1.4 30,36.623 C13.1@41,36.623 ; C13.1 41,38.525 C13.1@41,36.623 ; 50.25,31.873 50.25,32.373 46,36.623 C13.1@41,36.623
Iout_mon: C11.2 P6.3 P7.1 R9.2 U1.4 | length 24.1
  Top Layer w1: C11.2 106.772,13.536 C11.2@106.822,13.586 ; P6.3 107.192,13.956 C11.2@106.822,13.586 ; R9.2 C11.2@106.822,13.586
  Bottom Layer w0.4: P7.1 115.462,28.001 117.612,28.001 117.92,28.309 U1.4
  Bottom Layer w1: P6.3 107.192,19.831 P7.1
LED: P6.5 R12.1 | length 3.6
  Top Layer w1: R12.1 100.612,15.151 P6.5
NetC1_1: C1.1 L1.2 P2.1 | length 15.7
  Bottom Layer w1: C1.1@18.5,38.762 18.5,42.7 L1.2@18.6,42.8
  Bottom Layer w4: P2.1@7.285,40.678 13.578,40.678 15.7,42.8 L1.2@18,42.8
NetC16_1: C16.1 R11.2 U3.3 | length 4.7
  Bottom Layer w1: C16.1 45.032,7.311 46.712,7.311 47.294,6.729 U3.3 47.354,6.754 49.025,6.754 49.089,6.818 R11.2
NetC16_2: C16.2 D5.A D6.C | length 5.6
  Bottom Layer w1: C16.2 D6.C
  Bottom Layer w2: D6.C 44.912,12.721 D5.A
NetC21_2: C21.2 C22.1 C23.1 C24.1 D9.1 R13.1 U3.1 | length 29.3
  Top Layer w1: U3.1 49.992,14.473 55.64,14.473 57.412,12.701 C23.1 59.341,8.086 59.39,8.135 R13.1@59.6,8.135
  Bottom Layer w0.5: 51.98,14.353 D9.1
  Bottom Layer w1: U3.1 U3.1@47.394,11.874 ; U3.1@47.412,12.023 47.394,12.004 U3.1@47.394,11.874 ; C22.1@49.399,12.078 C22.1@49.359,12.078 ; C21.2 51.8,14.185 51.649,14.033 51.649,11.873 C24.1 51.529,11.898 51.409,12.018 49.419,12.018 C22.1@49.359,12.078 ; U3.1@47.394,11.874 47.538,12.018 49.299,12.018 C22.1@49.359,12.078
NetC22_2: C22.2 R11.1 U3.2 U3.6 | length 11.1
  Top Layer w1: U3.2 47.354,9.244 49.118,9.244 51.633,6.729 U3.6
  Bottom Layer w1: U3.2 47.354,9.294 49.065,9.294 49.299,9.528
NetC23_2: C23.2 U3.5 | length 3.8
  Top Layer w1: U3.5 55.294,4.214 56.425,4.214 57.132,4.921 57.132,6.196 57.252,6.316 C23.2
NetD1_A: D1.A R2.2 | length 2.4
  Bottom Layer w1: R2.2 36.267,29.616 D1.A
NetD8_1: D8.1 R12.2 | length 1.9
  Top Layer w1: D8.1 R12.2
NetQ1_4: Q1.4 R3.2 R6.2 | length 11.1
  Bottom Layer w0.5: R3.2 49.477,23.116 50.162,23.801 54.412,23.801 55.662,25.051 55.662,26.119 55.712,26.169 Q1.4
  Bottom Layer w1: R6.2 R3.2
NetR5_1: R5.1 U1.1 | length 6
  Bottom Layer w0.4: R5.1 115.297,31.001 119.612,31.001 119.854,30.758 119.854,29.702 U1.1
NetR6_1: R6.1 U2.7 | length 5.7
  Bottom Layer w0.5: U2.7 43.142,20.344 43.435,20.051 45.162,20.051 45.662,20.551 45.662,21.551 R6.1
OUTPUT: C3.2 C4.2 L2.1 L3.2 | length 33.4
  Bottom Layer w1: C4.2 89.572,46.666 91.122,45.116 91.122,44.964 91.162,44.924 ; L2.1@90.605,33.051 91.122,33.568 91.122,44.884 91.162,44.924 ; C3.2 92.752,46.666 91.202,45.116 91.202,44.964 91.162,44.924 ; 102.162,44.924 91.162,44.924
  Bottom Layer w2: L3.2 90.105,32.551 L2.1@90.605,33.051
OUTPUT_F: C7.2 L2.2 R1.2 R5.2 U1.7 | length 18.8
  Bottom Layer w0.4: R1.2 113.227,33.07 R5.2 ; C7.2 116.072,33.166 116.637,32.601 118.912,32.601 119.22,32.909 U1.7
  Bottom Layer w1: L2.2 105.495,34.135 106.495,33.135 R1.2 113.178,33.15 115.896,33.15 C7.2
PV_IN: C1.2 L1.1 P2.2 | length 16.1
  Bottom Layer w1: C1.2@18.5,36.942 18.5,32.9 L1.1@18.6,32.8
  Bottom Layer w4: P2.2@7.285,35.678 13.122,35.678 16,32.8 L1.1@18,32.8
PWM: P6.9 U2.1 | length 51.8
  Top Layer w1: v1(46.687,17.451) 59.222,17.451 63.5,13.173 89.8,13.173 91.8,15.173 91.952,15.325 P6.9
  Bottom Layer w0.5: U2.1 44.462,16.851 46.009,16.851 46.609,17.451 v1(46.687,17.451)
SW: P6.7 S1.3 S1.4 | length 14.2
  Top Layer w1: S1.4 93.745,13.684 93.935,13.874 94.674,13.874 96.936,16.136 96.936,16.555 P6.7
SWITCH_node: C8.1 C21.1 C24.2 D3.4 D4.1 D6.A D9.2 L3.1 P5.1 Q1.1 Q1.2 Q1.3 R3.1 U2.6 U3.4 U3.8 | length 95.9
  Bottom Layer w0.5: D4.1 42.762,26.801 42.527,26.566 C8.1 42.527,24.641 41.872,23.986 U2.6 41.872,19.841 42.662,19.051 49.162,19.051 50.912,20.801 51.097,20.986 51.097,21.551 R3.1 ; D9.2 54.92,14.353 55.269,14.004 ; Q1.3 57.564,27.439 ; Q1.2 57.584,28.709 57.604,28.729 ; Q1.1 57.604,29.979
  Bottom Layer w1: D6.A 44.912,1.737 47.329,4.154 U3.4 50.401,4.189 53.299,7.088 C24.2 53.33,11.784 55.244,11.784 U3.8 55.269,14.004 55.269,14.924 55.1,15.093 55.1,16.073 ; R3.1 53.412,21.801 56.039,19.174 ; C21.1 55,16.173 55.1,16.073 ; 55.1,18.173 55.1,18.073 ; 57.564,27.439 57.676,27.327 57.676,20.811 ; P5.1 55.1,18.073 ; 55.1,16.073 55.1,18.073
  Bottom Layer w4: 56.039,19.174 57.676,20.811 59,22.135 59,29.123 60.812,30.935 D3.4@60.812,33.676 ; L3.1 57.551,33.676 D3.4@60.812,33.676 ; D3.4 63.687,36.551 D3.4@60.812,33.676
V_BOOT: C8.2 D1.C D2.C D4.2 D5.C U2.8 | length 12.9
  Bottom Layer w0.5: D4.2 44.062,26.801 44.297,26.566 C8.2 ; C8.2@44.362,24.614 44.362,21.851 U2.8
  Bottom Layer w1: C8.2 44.297,24.679 44.362,24.614 44.417,24.559 46.234,24.559 D5.C 46.452,24.421 46.452,26.761 46.492,26.801 46.452,26.841 D1.C@46.452,29.761 ; D1.C@46.332,29.801 D1.C@46.372,29.761
Vin_mon: C15.2 P6.4 R7.1 R10.2 | length 96.4
  Top Layer w1: R7.1 32.5,16.973 47.5,1.973 101.2,1.973 102.865,3.638 R10.2 102.865,11.723 C15.2 102.915,14.914 P6.4
Vout_mon: C12.2 P6.2 R4.1 R8.2 | length 32.7
  Top Layer w1: P6.2 109.828,16.555 109.828,15.435 110.402,14.861 110.402,13.586 R8.2 112.562,13.586 C12.2
  Bottom Layer w1: P6.2 109.828,16.746 109.828,18.428 111.85,20.45 114.55,20.45 122.45,28.35 R4.1
pads on no net: C5.NEG C5.POS C6.NEG C6.POS U1.2 U1.3 U1.6 U2.4 U3.7

## Polygon pours and split planes (outlines as drawn)
GND on Bottom Layer "GND_L02_P013" (solid, pour order 13): 0.8,27.373 20.1,27.373 22.6,29.873 22.6,47.616 28.257,52.723 126.2,52.723 126.2,0.573 0.8,0.573
NetC1_1 on Bottom Layer "Bottom Layer-NetC1_1" (solid, pour order 12): 0.9,38.373 17.6,38.373 17.85,38.123 19.6,38.123 20.1,38.623 20.1,43.873 19.1,44.873 0.9,44.873
PV_IN on Bottom Layer "Bottom Layer-PV_IN" (solid, pour order 10): 0.9,37.623 17.35,37.623 17.85,37.123 19.6,37.123 20.1,36.623 20.1,31.623 19.1,30.623 0.9,30.623
+5V on Bottom Layer "+5V_L02_P007" (solid, pour order 7): 31.35,19.123 29.85,20.623 27.6,20.623 27.1,20.123 27.1,14.373 30.85,14.373 31.35,14.873
+12V on Bottom Layer "Bottom Layer-+12V 1" (solid, pour order 6): 5.432,17.67 8.932,17.67 11.682,14.92 11.682,6.591 12.94,5.333 14.46,5.333 16.5,7.373 16.5,9.238 21.682,14.42 21.682,15.67 22.032,16.02 23.875,16.02 24.825,14.62 26.382,14.62 26.282,18.57 22.682,22.17 6.182,22.17 4.932,20.92 4.932,18.17
BUCK_OUT on Bottom Layer "BUCK_OUT_L02_P004" (solid, pour order 4): 122.35,45.123 121.35,46.123 111.35,46.123 109.1,43.873 109.1,36.373 110.1,35.373 113.85,35.373 115.35,36.873 115.35,38.123 121.85,38.123 122.35,38.623
OUTPUT_F on Bottom Layer "OUTPUT_F_L02_P003" (solid, pour order 3): 104.35,41.373 107.35,41.373 108.35,40.373 108.35,36.623 110.35,34.623 115.35,34.623 115.35,32.123 112.6,32.123 108.1,27.623 104.35,27.623
OUTPUT on Bottom Layer "OUTPUT_L02_P002" (solid, pour order 2): 88.35,46.623 83.6,41.873 83.6,29.373 86.35,26.623 90.6,26.623 92.35,28.373 92.35,41.123 93.85,42.623 104.35,42.623 105.6,43.873 105.6,45.373 104.35,46.623
SWITCH_node on Bottom Layer "SWITCH_NODE_L02_P001" (solid, pour order 1): 72.35,41.373 56.6,41.373 54.6,39.373 54.6,32.373 54.6,26.373 54.6,21.873 52.35,19.623 52.35,15.873 54.35,13.873 71.6,13.873 75.1,17.373 75.1,39.798 73.506,41.392
INPUT on Bottom Layer "INPUT_L02_P000" (solid, pour order 0): 25.35,38.873 25.35,31.623 26.1,30.873 44.85,30.873 45.85,29.873 45.85,25.623 46.6,24.873 53.1,24.873 54.1,25.873 54.1,38.623 52.6,40.123 32.1,40.123 30.85,38.873
GND on Top Layer "GND_L01_P009" (solid, pour order 9): 0.8,27.373 20.1,27.373 22.6,29.873 22.6,47.373 27.9,52.673 126.3,52.673 126.3,0.473 0.8,0.473
INPUT on Top Layer "Top Layer-No Net" (solid, pour order 8): 34.35,30.123 35.35,31.123 41.6,31.123 45.35,34.873 45.35,41.623 44.35,42.623 36.1,42.623 27.1,33.623 27.1,31.123 28.1,30.123

## Keep-outs
Keep-Out Layer:
  lines w0.254: 0,0 126.75,0 126.75,53 0,53 0,0

## Silkscreen, mask and mechanical layers (free items; w line width, h text height)
Top Overlay:
  text "IN-" at 1,48.373 h1.6 r270
  text "Out+" at 125.9,35.773 h1.6 r90
  text "IN+" at 1.1,31.673 h1.6 r270
  text "+" at 6.6,25.473 h1.6 r270
  text "PWM / +5V / SW / GND / Led / Vin / Iout / Vout / GND" at 113,19.073 h1.6 r90
Bottom Overlay:
  drawing of 6 lines, arcs and shapes, not listed
  text "GEI Corp / Buck / 12/2020" at 118.4,4.273 h3.5

## Text inside footprints (layer, text, board x,y; h text height)
U1: Bottom Overlay "*" at 120.165,28.848 h1.27 r270; Mechanical 13 "*" at 119.098,30.143 h1.27 r270